# EAGLE board 09B-10-A1-01 (EAGLE 6.3)
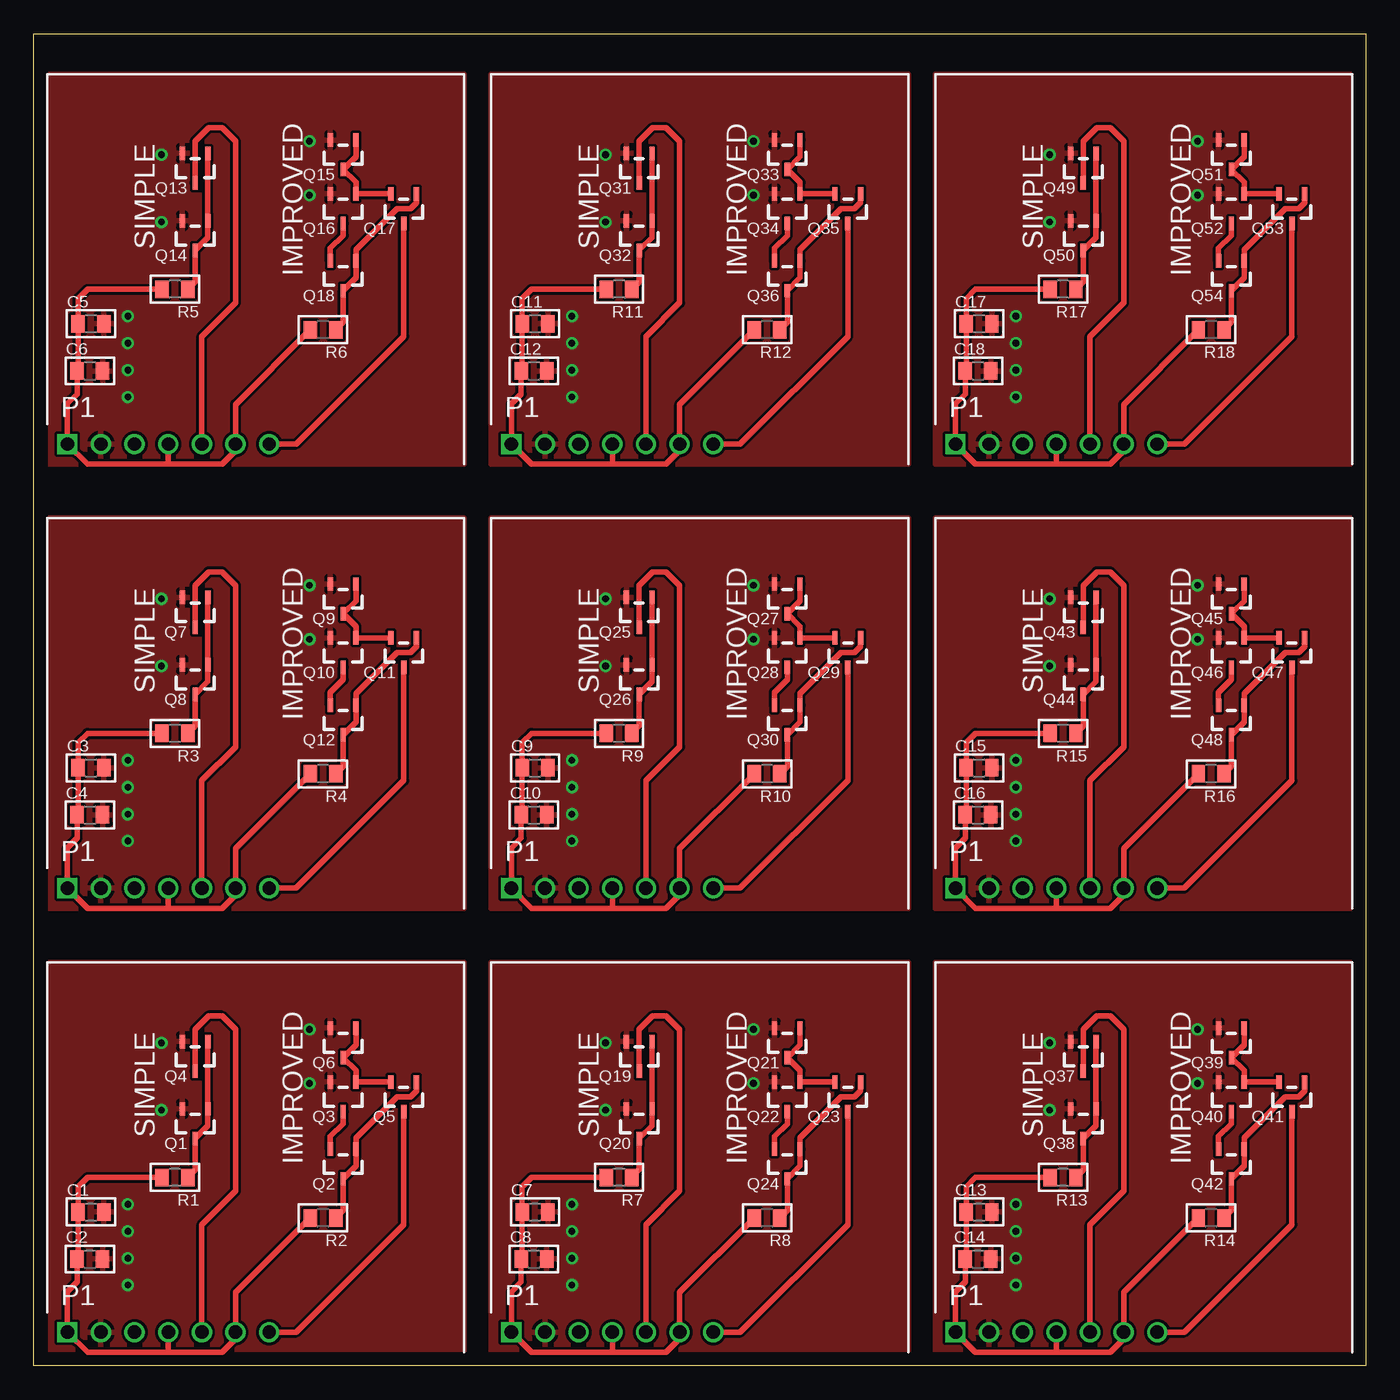
[diagram p0: board, top side]
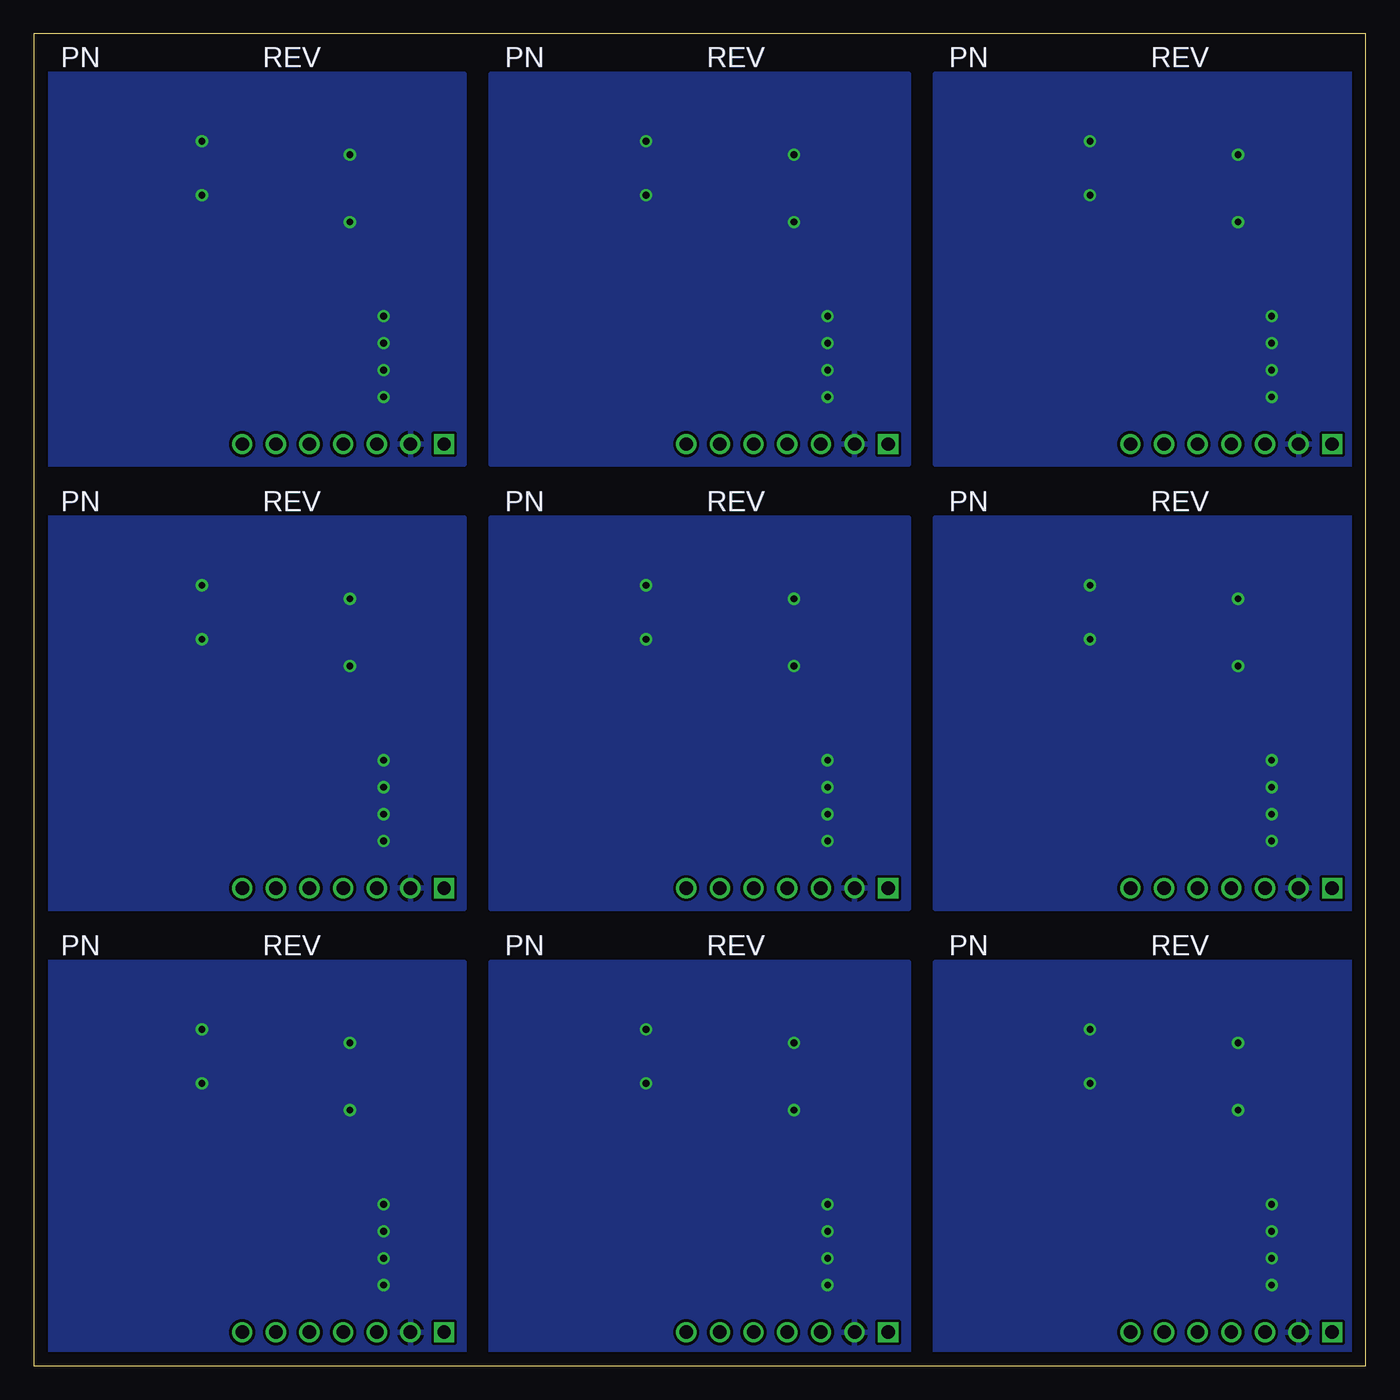
[diagram p1: board, bottom side, seen from below]

Size 99 x 99 mm. Coordinates in mm from the lower left corner, seen from the top.
Outline: 0,0 0,99 99,99 99,0 0,0
Copper layers (1*16): Top 0.035mm / dielectric 1.5mm / Bottom 0.035mm
Design rules "default": minimum track width 10mil, minimum drill 0.6mm, track to track 8mil, track to pad 8mil, pad to pad 8mil, via to via 8mil, smd to smd 8mil, copper to edge 40mil, drill to drill 8mil, minimum pad ring 10mil, minimum via ring 8mil, stop-mask expansion 4mil, vias tented up to drill 0mil, thermal gap 10mil

## Footprints (pad centres in the part's own frame; a part is rotated, then mirrored left to right if it is on the bottom)
C0805 = smd 1 x 1.3: 1ASD -0.95,0; 2ASDF 0.95,0
PINS_1X7 = drill 1 square: 1 0,0 | drill 1: 2 2.5,0; 3 5,0; 4 7.5,0; 5 10,0; 6 12.5,0; 7 15,0
SOT23 = smd 0.4 x 1: 1 -0.95,-1.1; 2 0.95,-1.1; 3 0,1.1
R0805 = smd 1 x 1.3: 1 -0.95,0; 2 0.95,0

## Placement (x,y rotation side)
C1  [C0805]  4.26,11.44 0 top
C2  [C0805]  4.18,7.94 0 top
C3  [C0805]  4.26,44.44 0 top
C4  [C0805]  4.18,40.94 0 top
C5  [C0805]  4.26,77.44 0 top
C6  [C0805]  4.18,73.94 0 top
C7  [C0805]  37.26,11.44 0 top
C8  [C0805]  37.18,7.94 0 top
C9  [C0805]  37.26,44.44 0 top
C10  [C0805]  37.18,40.94 0 top
C11  [C0805]  37.26,77.44 0 top
C12  [C0805]  37.18,73.94 0 top
C13  [C0805]  70.26,11.44 0 top
C14  [C0805]  70.18,7.94 0 top
C15  [C0805]  70.26,44.44 0 top
C16  [C0805]  70.18,40.94 0 top
C17  [C0805]  70.26,77.44 0 top
C18  [C0805]  70.18,73.94 0 top
P1  [PINS_1X7]  2.5,2.5 0 top
P2  [PINS_1X7]  2.5,35.5 0 top
P3  [PINS_1X7]  2.5,68.5 0 top
P4  [PINS_1X7]  35.5,2.5 0 top
P5  [PINS_1X7]  35.5,35.5 0 top
P6  [PINS_1X7]  35.5,68.5 0 top
P7  [PINS_1X7]  68.5,2.5 0 top
P8  [PINS_1X7]  68.5,35.5 0 top
P9  [PINS_1X7]  68.5,68.5 0 top
PCB1  [PCB33]  0,0 0 top
PCB2  [PCB33]  0,33 0 top
PCB3  [PCB33]  0,66 0 top
PCB4  [PCB33]  33,0 0 top
PCB5  [PCB33]  33,33 0 top
PCB6  [PCB33]  33,66 0 top
PCB7  [PCB33]  66,0 0 top
PCB8  [PCB33]  66,33 0 top
PCB9  [PCB33]  66,66 0 top
Q1  [SOT23]  12,18 180 top
Q2  [SOT23]  23,15 180 top
Q3  [SOT23]  23,20 180 top
Q4  [SOT23]  12,23 180 top
Q5  [SOT23]  27.5,20 180 top
Q6  [SOT23]  23,24 180 top
Q7  [SOT23]  12,56 180 top
Q8  [SOT23]  12,51 180 top
Q9  [SOT23]  23,57 180 top
Q10  [SOT23]  23,53 180 top
Q11  [SOT23]  27.5,53 180 top
Q12  [SOT23]  23,48 180 top
Q13  [SOT23]  12,89 180 top
Q14  [SOT23]  12,84 180 top
Q15  [SOT23]  23,90 180 top
Q16  [SOT23]  23,86 180 top
Q17  [SOT23]  27.5,86 180 top
Q18  [SOT23]  23,81 180 top
Q19  [SOT23]  45,23 180 top
Q20  [SOT23]  45,18 180 top
Q21  [SOT23]  56,24 180 top
Q22  [SOT23]  56,20 180 top
Q23  [SOT23]  60.5,20 180 top
Q24  [SOT23]  56,15 180 top
Q25  [SOT23]  45,56 180 top
Q26  [SOT23]  45,51 180 top
Q27  [SOT23]  56,57 180 top
Q28  [SOT23]  56,53 180 top
Q29  [SOT23]  60.5,53 180 top
Q30  [SOT23]  56,48 180 top
Q31  [SOT23]  45,89 180 top
Q32  [SOT23]  45,84 180 top
Q33  [SOT23]  56,90 180 top
Q34  [SOT23]  56,86 180 top
Q35  [SOT23]  60.5,86 180 top
Q36  [SOT23]  56,81 180 top
Q37  [SOT23]  78,23 180 top
Q38  [SOT23]  78,18 180 top
Q39  [SOT23]  89,24 180 top
Q40  [SOT23]  89,20 180 top
Q41  [SOT23]  93.5,20 180 top
Q42  [SOT23]  89,15 180 top
Q43  [SOT23]  78,56 180 top
Q44  [SOT23]  78,51 180 top
Q45  [SOT23]  89,57 180 top
Q46  [SOT23]  89,53 180 top
Q47  [SOT23]  93.5,53 180 top
Q48  [SOT23]  89,48 180 top
Q49  [SOT23]  78,89 180 top
Q50  [SOT23]  78,84 180 top
Q51  [SOT23]  89,90 180 top
Q52  [SOT23]  89,86 180 top
Q53  [SOT23]  93.5,86 180 top
Q54  [SOT23]  89,81 180 top
R1  [R0805]  10.5,14 180 top
R2  [R0805]  21.5,11 180 top
R3  [R0805]  10.5,47 180 top
R4  [R0805]  21.5,44 180 top
R5  [R0805]  10.5,80 180 top
R6  [R0805]  21.5,77 180 top
R7  [R0805]  43.5,14 180 top
R8  [R0805]  54.5,11 180 top
R9  [R0805]  43.5,47 180 top
R10  [R0805]  54.5,44 180 top
R11  [R0805]  43.5,80 180 top
R12  [R0805]  54.5,77 180 top
R13  [R0805]  76.5,14 180 top
R14  [R0805]  87.5,11 180 top
R15  [R0805]  76.5,47 180 top
R16  [R0805]  87.5,44 180 top
R17  [R0805]  76.5,80 180 top
R18  [R0805]  87.5,77 180 top

## Library data of the parts
C1-C18 P1-P9 Q1-Q54 R1-R18 = minipcb
PCB1-PCB9 = minipcb; PART_NUMBER: 09B-10; REVISION: A1-01; TITLE: CURRENT MIRRORS

## Nets
GND: C1.2ASDF C2.2ASDF P1.2 Q1.2 Q3.2 Q4.2 Q6.2
GND1: C3.2ASDF C4.2ASDF P2.2 Q7.2 Q8.2 Q9.2 Q10.2
GND2: C5.2ASDF C6.2ASDF P3.2 Q13.2 Q14.2 Q15.2 Q16.2
GND3: C7.2ASDF C8.2ASDF P4.2 Q19.2 Q20.2 Q21.2 Q22.2
GND4: C9.2ASDF C10.2ASDF P5.2 Q25.2 Q26.2 Q27.2 Q28.2
GND5: C11.2ASDF C12.2ASDF P6.2 Q31.2 Q32.2 Q33.2 Q34.2
GND6: C13.2ASDF C14.2ASDF P7.2 Q37.2 Q38.2 Q39.2 Q40.2
GND7: C15.2ASDF C16.2ASDF P8.2 Q43.2 Q44.2 Q45.2 Q46.2
GND8: C17.2ASDF C18.2ASDF P9.2 Q49.2 Q50.2 Q51.2 Q52.2
N$1: Q1.1 Q1.3 Q4.1 R1.1
N$2: P1.5 Q4.3
N$3: Q3.1 Q5.2 Q6.1 Q6.3
N$4: Q2.1 Q2.3 Q5.1 R2.1
N$5: Q2.2 Q3.3
N$6: Q7.1 Q8.1 Q8.3 R3.1
N$7: P1.7 Q5.3
N$8: P1.3
N$9: P2.5 Q7.3
N$10: Q9.1 Q9.3 Q10.1 Q11.2
N$11: Q11.1 Q12.1 Q12.3 R4.1
N$12: Q10.3 Q12.2
N$13: P2.7 Q11.3
N$14: P2.3
N$15: Q13.1 Q14.1 Q14.3 R5.1
N$16: P3.5 Q13.3
N$17: Q15.1 Q15.3 Q16.1 Q17.2
N$18: Q17.1 Q18.1 Q18.3 R6.1
N$19: Q16.3 Q18.2
N$20: P3.7 Q17.3
N$21: P3.3
N$22: Q19.1 Q20.1 Q20.3 R7.1
N$23: P4.5 Q19.3
N$24: Q21.1 Q21.3 Q22.1 Q23.2
N$25: Q23.1 Q24.1 Q24.3 R8.1
N$26: Q22.3 Q24.2
N$27: P4.7 Q23.3
N$28: P4.3
N$29: Q25.1 Q26.1 Q26.3 R9.1
N$30: P5.5 Q25.3
N$31: Q27.1 Q27.3 Q28.1 Q29.2
N$32: Q29.1 Q30.1 Q30.3 R10.1
N$33: Q28.3 Q30.2
N$34: P5.7 Q29.3
N$35: P5.3
N$36: Q31.1 Q32.1 Q32.3 R11.1
N$37: P6.5 Q31.3
N$38: Q33.1 Q33.3 Q34.1 Q35.2
N$39: Q35.1 Q36.1 Q36.3 R12.1
N$40: Q34.3 Q36.2
N$41: P6.7 Q35.3
N$42: P6.3
N$43: Q37.1 Q38.1 Q38.3 R13.1
N$44: P7.5 Q37.3
N$45: Q39.1 Q39.3 Q40.1 Q41.2
N$46: Q41.1 Q42.1 Q42.3 R14.1
N$47: Q40.3 Q42.2
N$48: P7.7 Q41.3
N$49: P7.3
N$50: Q43.1 Q44.1 Q44.3 R15.1
N$51: P8.5 Q43.3
N$52: Q45.1 Q45.3 Q46.1 Q47.2
N$53: Q47.1 Q48.1 Q48.3 R16.1
N$54: Q46.3 Q48.2
N$55: P8.7 Q47.3
N$56: P8.3
N$57: Q49.1 Q50.1 Q50.3 R17.1
N$58: P9.5 Q49.3
N$59: Q51.1 Q51.3 Q52.1 Q53.2
N$60: Q53.1 Q54.1 Q54.3 R18.1
N$61: Q52.3 Q54.2
N$62: P9.7 Q53.3
N$63: P9.3
V+: C1.1ASD C2.1ASD P1.1 P1.4 P1.6 R1.2 R2.2
V+1: C3.1ASD C4.1ASD P2.1 P2.4 P2.6 R3.2 R4.2
V+2: C5.1ASD C6.1ASD P3.1 P3.4 P3.6 R5.2 R6.2
V+3: C7.1ASD C8.1ASD P4.1 P4.4 P4.6 R7.2 R8.2
V+4: C9.1ASD C10.1ASD P5.1 P5.4 P5.6 R9.2 R10.2
V+5: C11.1ASD C12.1ASD P6.1 P6.4 P6.6 R11.2 R12.2
V+6: C13.1ASD C14.1ASD P7.1 P7.4 P7.6 R13.2 R14.2
V+7: C15.1ASD C16.1ASD P8.1 P8.4 P8.6 R15.2 R16.2
V+8: C17.1ASD C18.1ASD P9.1 P9.4 P9.6 R17.2 R18.2

## Tracks (layer width: path | path; a pad name or v marks a point on that pad's centre or on a via)
GND  (via drill 0.5)
  other vias: 7,12 7,10 7,8 7,6 9.5,19 9.5,24 20.5,25 20.5,21
  pour Bottom: 1,1 32,1 32,30 1,30
  pour Top: 1,1 32,1 32,30 1,30
GND1  (via drill 0.5)
  other vias: 7,45 7,43 7,41 7,39 9.5,52 9.5,57 20.5,58 20.5,54
  pour Bottom: 1,34 32,34 32,63 1,63
  pour Top: 1,34 32,34 32,63 1,63
GND2  (via drill 0.5)
  other vias: 7,78 7,76 7,74 7,72 9.5,85 9.5,90 20.5,91 20.5,87
  pour Bottom: 1,67 32,67 32,96 1,96
  pour Top: 1,67 32,67 32,96 1,96
GND3  (via drill 0.5)
  other vias: 40,12 40,10 40,8 40,6 42.5,19 42.5,24 53.5,25 53.5,21
  pour Bottom: 34,1 65,1 65,30 34,30
  pour Top: 34,1 65,1 65,30 34,30
GND4  (via drill 0.5)
  other vias: 40,45 40,43 40,41 40,39 42.5,52 42.5,57 53.5,58 53.5,54
  pour Bottom: 34,34 65,34 65,63 34,63
  pour Top: 34,34 65,34 65,63 34,63
GND5  (via drill 0.5)
  other vias: 40,78 40,76 40,74 40,72 42.5,85 42.5,90 53.5,91 53.5,87
  pour Bottom: 34,67 65,67 65,96 34,96
  pour Top: 34,67 65,67 65,96 34,96
GND6  (via drill 0.5)
  other vias: 73,12 73,10 73,8 73,6 75.5,19 75.5,24 86.5,25 86.5,21
  pour Bottom: 67,1 98,1 98,30 67,30
  pour Top: 67,1 98,1 98,30 67,30
GND7  (via drill 0.5)
  other vias: 73,45 73,43 73,41 73,39 75.5,52 75.5,57 86.5,58 86.5,54
  pour Bottom: 67,34 98,34 98,63 67,63
  pour Top: 67,34 98,34 98,63 67,63
GND8  (via drill 0.5)
  other vias: 73,78 73,76 73,74 73,72 75.5,85 75.5,90 86.5,91 86.5,87
  pour Bottom: 67,67 98,67 98,96 67,96
  pour Top: 67,67 98,67 98,96 67,96
N$1
  Top 0.406: R1.1 12,14.55 Q1.3 12.95,17.85 Q1.1 Q4.1
N$2
  Top 0.406: P1.5 12.5,10.5 15,13 15,25 14,26 13,26 12,25 Q4.3
N$3
  Top 0.406: Q6.1 23.95,23.85 Q6.3 23.95,21.95 Q3.1 Q5.2
N$4
  Top 0.406: R2.1 23,11.55 Q2.3 23.95,14.85 Q2.1 23.95,16.95 27,20 28,20 28.45,20.45 Q5.1
N$5
  Top 0.406: Q2.2 22.05,17.05 23,18 Q3.3
N$6
  Top 0.406: R3.1 12,47.55 Q8.3 12.95,50.85 Q8.1 Q7.1
N$7
  Top 0.406: P1.7 19.5,2.5 27.5,10.5 Q5.3
N$9
  Top 0.406: P2.5 12.5,43.5 15,46 15,58 14,59 13,59 12,58 Q7.3
N$10
  Top 0.406: Q9.1 23.95,56.85 Q9.3 23.95,54.95 Q10.1 Q11.2
N$11
  Top 0.406: R4.1 23,44.55 Q12.3 23.95,47.85 Q12.1 23.95,49.95 27,53 28,53 28.45,53.45 Q11.1
N$12
  Top 0.406: Q12.2 22.05,50.05 23,51 Q10.3
N$13
  Top 0.406: P2.7 19.5,35.5 27.5,43.5 Q11.3
N$15
  Top 0.406: R5.1 12,80.55 Q14.3 12.95,83.85 Q14.1 Q13.1
N$16
  Top 0.406: P3.5 12.5,76.5 15,79 15,91 14,92 13,92 12,91 Q13.3
N$17
  Top 0.406: Q15.1 23.95,89.85 Q15.3 23.95,87.95 Q16.1 Q17.2
N$18
  Top 0.406: R6.1 23,77.55 Q18.3 23.95,80.85 Q18.1 23.95,82.95 27,86 28,86 28.45,86.45 Q17.1
N$19
  Top 0.406: Q18.2 22.05,83.05 23,84 Q16.3
N$20
  Top 0.406: P3.7 19.5,68.5 27.5,76.5 Q17.3
N$22
  Top 0.406: R7.1 45,14.55 Q20.3 45.95,17.85 Q20.1 Q19.1
N$23
  Top 0.406: P4.5 45.5,10.5 48,13 48,25 47,26 46,26 45,25 Q19.3
N$24
  Top 0.406: Q21.1 56.95,23.85 Q21.3 56.95,21.95 Q22.1 Q23.2
N$25
  Top 0.406: R8.1 56,11.55 Q24.3 56.95,14.85 Q24.1 56.95,16.95 60,20 61,20 61.45,20.45 Q23.1
N$26
  Top 0.406: Q24.2 55.05,17.05 56,18 Q22.3
N$27
  Top 0.406: P4.7 52.5,2.5 60.5,10.5 Q23.3
N$29
  Top 0.406: R9.1 45,47.55 Q26.3 45.95,50.85 Q26.1 Q25.1
N$30
  Top 0.406: P5.5 45.5,43.5 48,46 48,58 47,59 46,59 45,58 Q25.3
N$31
  Top 0.406: Q27.1 56.95,56.85 Q27.3 56.95,54.95 Q28.1 Q29.2
N$32
  Top 0.406: R10.1 56,44.55 Q30.3 56.95,47.85 Q30.1 56.95,49.95 60,53 61,53 61.45,53.45 Q29.1
N$33
  Top 0.406: Q30.2 55.05,50.05 56,51 Q28.3
N$34
  Top 0.406: P5.7 52.5,35.5 60.5,43.5 Q29.3
N$36
  Top 0.406: R11.1 45,80.55 Q32.3 45.95,83.85 Q32.1 Q31.1
N$37
  Top 0.406: P6.5 45.5,76.5 48,79 48,91 47,92 46,92 45,91 Q31.3
N$38
  Top 0.406: Q33.1 56.95,89.85 Q33.3 56.95,87.95 Q34.1 Q35.2
N$39
  Top 0.406: R12.1 56,77.55 Q36.3 56.95,80.85 Q36.1 56.95,82.95 60,86 61,86 61.45,86.45 Q35.1
N$40
  Top 0.406: Q36.2 55.05,83.05 56,84 Q34.3
N$41
  Top 0.406: P6.7 52.5,68.5 60.5,76.5 Q35.3
N$43
  Top 0.406: R13.1 78,14.55 Q38.3 78.95,17.85 Q38.1 Q37.1
N$44
  Top 0.406: P7.5 78.5,10.5 81,13 81,25 80,26 79,26 78,25 Q37.3
N$45
  Top 0.406: Q39.1 89.95,23.85 Q39.3 89.95,21.95 Q40.1 Q41.2
N$46
  Top 0.406: R14.1 89,11.55 Q42.3 89.95,14.85 Q42.1 89.95,16.95 93,20 94,20 94.45,20.45 Q41.1
N$47
  Top 0.406: Q42.2 88.05,17.05 89,18 Q40.3
N$48
  Top 0.406: P7.7 85.5,2.5 93.5,10.5 Q41.3
N$50
  Top 0.406: R15.1 78,47.55 Q44.3 78.95,50.85 Q44.1 Q43.1
N$51
  Top 0.406: P8.5 78.5,43.5 81,46 81,58 80,59 79,59 78,58 Q43.3
N$52
  Top 0.406: Q45.1 89.95,56.85 Q45.3 89.95,54.95 Q46.1 Q47.2
N$53
  Top 0.406: R16.1 89,44.55 Q48.3 89.95,47.85 Q48.1 89.95,49.95 93,53 94,53 94.45,53.45 Q47.1
N$54
  Top 0.406: Q48.2 88.05,50.05 89,51 Q46.3
N$55
  Top 0.406: P8.7 85.5,35.5 93.5,43.5 Q47.3
N$57
  Top 0.406: R17.1 78,80.55 Q50.3 78.95,83.85 Q50.1 Q49.1
N$58
  Top 0.406: P9.5 78.5,76.5 81,79 81,91 80,92 79,92 78,91 Q49.3
N$59
  Top 0.406: Q51.1 89.95,89.85 Q51.3 89.95,87.95 Q52.1 Q53.2
N$60
  Top 0.406: R18.1 89,77.55 Q54.3 89.95,80.85 Q54.1 89.95,82.95 93,86 94,86 94.45,86.45 Q53.1
N$61
  Top 0.406: Q54.2 88.05,83.05 89,84 Q52.3
N$62
  Top 0.406: P9.7 85.5,68.5 93.5,76.5 Q53.3
V+
  Top 0.406: R1.2 4,14 3.31,13.31 C1.1ASD 3.31,8.02 C2.1ASD 3.23,6.23 2.5,5.5 P1.1 4,1 10,1 | 10,1 14,1 15,2 P1.6 15,5.45 R2.2 | P1.4 10,1
V+1
  Top 0.406: R3.2 4,47 3.31,46.31 C3.1ASD 3.31,41.02 C4.1ASD 3.23,39.23 2.5,38.5 P2.1 4,34 10,34 | 10,34 14,34 15,35 P2.6 15,38.45 R4.2 | P2.4 10,34
V+2
  Top 0.406: R5.2 4,80 3.31,79.31 C5.1ASD 3.31,74.02 C6.1ASD 3.23,72.23 2.5,71.5 P3.1 4,67 10,67 | 10,67 14,67 15,68 P3.6 15,71.45 R6.2 | P3.4 10,67
V+3
  Top 0.406: R7.2 37,14 36.31,13.31 C7.1ASD 36.31,8.02 C8.1ASD 36.23,6.23 35.5,5.5 P4.1 37,1 43,1 | 43,1 47,1 48,2 P4.6 48,5.45 R8.2 | P4.4 43,1
V+4
  Top 0.406: R9.2 37,47 36.31,46.31 C9.1ASD 36.31,41.02 C10.1ASD 36.23,39.23 35.5,38.5 P5.1 37,34 43,34 | 43,34 47,34 48,35 P5.6 48,38.45 R10.2 | P5.4 43,34
V+5
  Top 0.406: R11.2 37,80 36.31,79.31 C11.1ASD 36.31,74.02 C12.1ASD 36.23,72.23 35.5,71.5 P6.1 37,67 43,67 | 43,67 47,67 48,68 P6.6 48,71.45 R12.2 | P6.4 43,67
V+6
  Top 0.406: R13.2 70,14 69.31,13.31 C13.1ASD 69.31,8.02 C14.1ASD 69.23,6.23 68.5,5.5 P7.1 70,1 76,1 | 76,1 80,1 81,2 P7.6 81,5.45 R14.2 | P7.4 76,1
V+7
  Top 0.406: R15.2 70,47 69.31,46.31 C15.1ASD 69.31,41.02 C16.1ASD 69.23,39.23 68.5,38.5 P8.1 70,34 76,34 | 76,34 80,34 81,35 P8.6 81,38.45 R16.2 | P8.4 76,34
V+8
  Top 0.406: R17.2 70,80 69.31,79.31 C17.1ASD 69.31,74.02 C18.1ASD 69.23,72.23 68.5,71.5 P9.1 70,67 76,67 | 76,67 80,67 81,68 P9.6 81,71.45 R18.2 | P9.4 76,67

## Text on the board
tPlace: SIMPLE | SIMPLE | SIMPLE | IMPROVED | IMPROVED | IMPROVED | SIMPLE | SIMPLE | SIMPLE | IMPROVED | IMPROVED | IMPROVED | SIMPLE | SIMPLE | SIMPLE | IMPROVED | IMPROVED | IMPROVED